# Altium PCB LED6432Clock.PcbDoc (part 2 of 6)
Units mm, origin at the board's own origin, x right, y up, seen from the top; angles counter-clockwise.
Board outline 152.4 x 101.6 mm, 2 copper layers (Top Layer, Bottom Layer); 48 components, 0 nets, 638 pads, 127 vias.
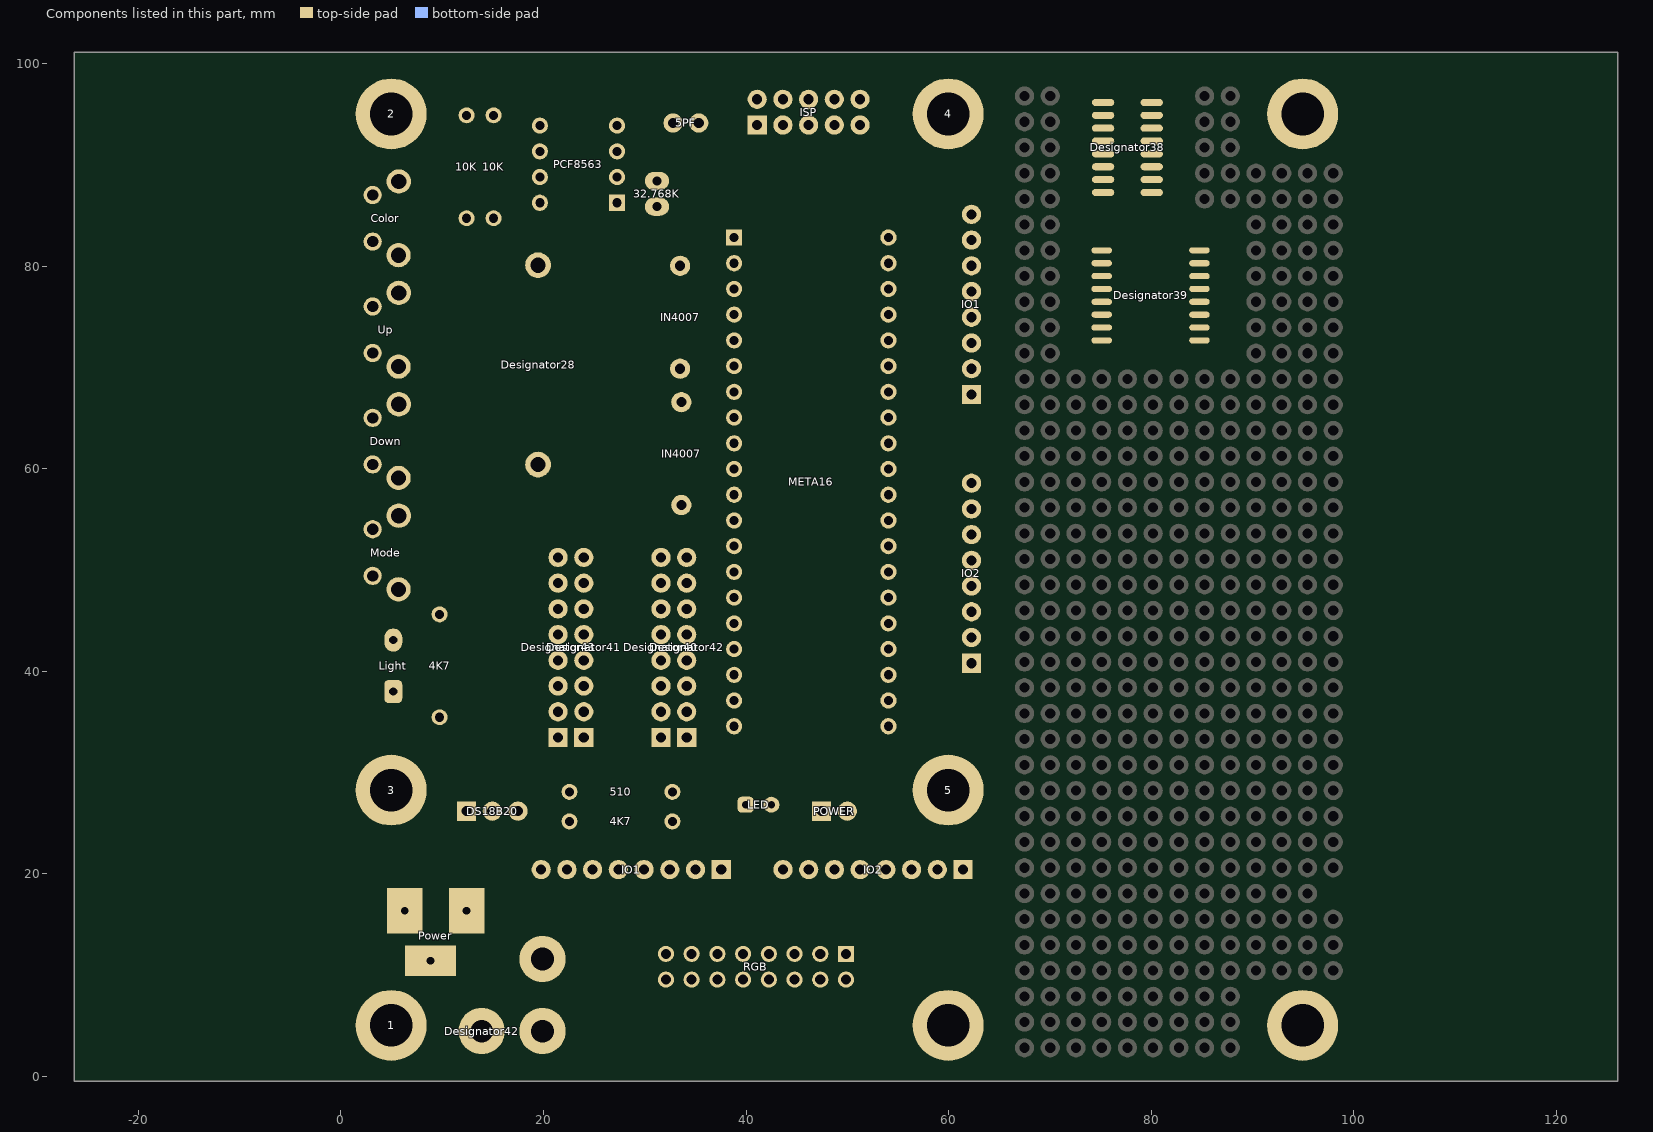
[diagram p2: the components of this part, seen from the top]

## Via types
v1: diameter 0.6, hole 0.3, Top Layer to Bottom Layer, 67 vias
v2: diameter 1.27, hole 0.711, Top Layer to Bottom Layer, 60 vias

## Nets (pads, with @x,y where several pads share a name; then routed paths per layer and width w, separated by ;. In a path a pad name is that pad's centre, name@x,y a point inside that pad or via, vN(x,y) a via of type N, cw(c..) or ccw(c..) an arc to the next point about the centre after c; other vN are vias at no path point) (continued)
copper on no net: (continued)
  Top Layer w0.16: 9.734,40.751 10.515,40.751 11.402,41.638 11.377,41.664 11.377,46.693 11.199,46.871 11.199,57.31 11.199,81.491 12.52,82.812 15.67,82.812 16.33,83.472 19.683,83.472 v1(22.528,83.472) ; 12.535,70.285 ccw(c12.448,70.644) v1@12.791,70.506 ; v1(12.698,70.543) 12.596,70.543 12.164,70.112 ; v1(14.501,76.081) 16.432,74.15 16.432,43.518 21.41,38.539 21.435,38.539 ; v1@14.781,62.415 14.323,61.958 14.323,41.537 19.861,35.999 ; 14.941,26.187 14.941,29.048 15.72,29.827 38.453,29.827 38.733,29.827 v1(41.476,32.57) ; v1(17.422,46.083) 17.422,46.566 ; 20.313,39.484 ccw(c21.692,39.852) 21.418,38.451 ; 20.341,41.547 cw(c20.435,39.953) 21.495,41.147 ; 20.345,41.702 cw(c20.447,39.967) 21.601,41.266 ; 20.349,41.857 cw(c20.46,39.981) 21.708,41.386 ccw(c20.81,40.375) 20.73,41.725 ; 20.374,44.158 cw(c20.362,42.562) 21.5,43.683 ; 20.379,39.236 ccw(c21.638,39.572) 21.387,38.294 ; 20.388,44.313 cw(c20.376,42.575) 21.613,43.795 ; 20.403,44.467 cw(c20.389,42.588) 21.727,43.907 ccw(c20.765,42.958) 20.775,44.31 ; 20.439,39.664 cw(c20.07,38.217) 21.523,38.56 ; 20.446,38.989 ccw(c21.583,39.292) 21.357,38.137 ; 20.489,48.985 ccw(c21.397,49.228) 21.465,48.29 ; 20.493,39.407 ccw(c21.538,39.687) 21.442,38.609 ; 20.538,39.49 cw(c20.246,38.401) 21.366,38.531 ; 20.552,39.186 ccw(c21.517,39.444) 21.427,38.45 ; 20.588,41.561 ccw(c20.571,41.847) 20.785,41.657 ; 20.621,44.157 ccw(c20.624,44.443) 20.825,44.239 ; 20.695,39.598 cw(c20.36,38.285) 21.679,38.597 ; 20.721,49.488 cw(c20.834,47.999) 21.807,49.132 ; 20.734,41.88 cw(c20.822,40.389) 21.814,41.506 ; 20.766,39.429 cw(c20.498,38.43) 21.525,38.55 ; 20.783,39.264 ccw(c20.857,39.541) 21,39.293 ; 20.789,44.464 cw(c20.778,42.971) 21.841,44.02 ; 20.951,39.533 cw(c20.65,38.354) 21.834,38.634 ; 21.207,39.468 cw(c20.94,38.422) 21.99,38.671 ; 21.207,48.75 20.826,48.75 19.734,49.842 ; 21.435,33.459 13.536,33.459 12.164,34.831 12.164,70.112 ; 21.435,35.999 19.861,35.999 ; 21.435,41.079 20.47,41.079 ; 21.435,43.619 20.572,43.619 19.175,45.016 ; 21.435,51.239 21.435,52.586 ; v1(23.798,54.643) 23.366,54.211 23.061,54.211 21.435,52.586 ; v1@25.339,73.862 cw(c25.283,73.475) 25.656,73.592 ; v1(25.347,73.922) 25.652,73.617 ; v1@25.38,73.704 cw(c25.429,73.388) 25.652,73.617 ; v1@25.386,73.705 cw(c25.438,73.417) 25.647,73.622 ; v1@25.406,73.93 ccw(c25.793,73.985) 25.677,73.612 ; v1@25.564,73.883 ccw(c25.852,73.831) 25.647,73.621 ; v1@25.564,73.888 ccw(c25.88,73.84) 25.652,73.617 ; v1@26.286,82.662 ccw(c25.959,83.325) 26.673,83.134 ; v1@26.356,82.519 ccw(c26.166,82.904) 26.582,82.793 ; v1@26.388,82.888 27.354,83.853 34.897,83.853 39.012,87.968 v1@39.012,88.654 ; 26.469,82.971 ccw(c26.791,82.885) v1@26.503,82.718 ; v1(27.1,78.875) 27.1,59.825 22.858,55.583 22.832,55.583 22.528,55.583 19.175,52.23 19.175,45.016 ; v1(27.887,81.059) 27.887,59.799 23.061,54.973 22.705,54.973 19.734,52.001 19.734,49.842 ; v1(29.386,81.872) 29.386,61.806 31.595,59.596 31.595,55.303 31.748,55.151 32.256,55.151 34.186,53.221 ; 31.157,10.332 ccw(c32.31,10.641) 32.07,9.472 ; 31.224,10.082 ccw(c32.252,10.358) 32.038,9.315 ; 31.291,9.832 ccw(c32.194,10.074) 32.006,9.159 ; 31.304,10.48 cw(c30.995,9.327) 32.165,9.566 ; 31.337,10.258 ccw(c32.158,10.478) 32.093,9.63 ; 31.379,10.3 cw(c31.159,9.479) 32.007,9.544 ; 31.395,10.039 ccw(c32.14,10.239) 32.08,9.471 ; 31.554,10.413 cw(c31.279,9.385) 32.322,9.599 ; 31.597,10.241 cw(c31.398,9.497) 32.166,9.557 ; 31.805,10.346 cw(c31.563,9.443) 32.478,9.631 ; 31.908,12.788 ccw(c31.804,13.19) 32.162,12.979 ; 32.047,12.809 ccw(c32.028,13.165) 32.336,12.987 ; 32.086,9.55 30.734,10.903 30.734,17.221 31.75,18.237 v1(34.874,18.237) ; 32.086,12.09 32.467,12.471 v1(32.467,16.821) ; 33.697,10.332 ccw(c34.85,10.641) 34.61,9.472 ; 33.764,10.082 ccw(c34.792,10.358) 34.578,9.315 ; 33.831,9.832 ccw(c34.734,10.074) 34.546,9.159 ; 33.844,10.48 cw(c33.535,9.327) 34.705,9.566 ; 33.877,10.258 ccw(c34.698,10.478) 34.633,9.63 ; 33.919,10.3 cw(c33.699,9.479) 34.547,9.544 ; 33.935,10.039 ccw(c34.68,10.239) 34.62,9.471 ; 34.094,10.413 cw(c33.819,9.385) 34.862,9.599 ; 34.135,46.159 35.278,46.159 ; 34.137,10.241 cw(c33.938,9.497) 34.706,9.557 ; 34.186,51.036 34.186,53.221 ; 34.345,10.346 cw(c34.103,9.443) 35.018,9.631 ; 34.626,9.55 33.35,10.827 33.35,12.954 33.274,13.03 33.274,14.783 33.274,15.342 36.144,18.212 37.008,18.212 37.547,18.751 37.547,18.955 ; 36.237,10.332 ccw(c37.39,10.641) 37.15,9.472 ; 36.304,10.082 ccw(c37.332,10.358) 37.118,9.315 ; v1@36.32,82.862 36.32,80.653 34.008,78.341 34.008,76.208 36.015,74.201 36.015,46.896 35.278,46.159 ; v1@36.338,82.584 cw(c36.218,82.468) 36.362,82.385 cw(c36.61,82.242) v1@36.546,82.521 ; v1@36.354,82.569 cw(c36.149,82.332) 36.42,82.176 ; 36.371,9.832 ccw(c37.274,10.074) 37.086,9.159 ; 36.384,10.48 cw(c36.075,9.327) 37.245,9.566 ; 36.417,10.258 ccw(c37.238,10.478) 37.173,9.63 ; v1@36.458,82.69 cw(c36.278,82.481) 36.517,82.344 ; 36.459,10.3 cw(c36.239,9.479) 37.087,9.544 ; 36.475,10.039 ccw(c37.22,10.239) 37.16,9.471 ; 36.634,10.413 cw(c36.359,9.385) 37.402,9.599 ; 36.677,10.241 cw(c36.478,9.497) 37.246,9.557 ; v1(36.752,79.433) 36.244,79.433 ; 36.885,10.346 cw(c36.643,9.443) 37.558,9.631 ; v1(37.16,16.739) 37.16,12.097 37.166,12.09 ; 37.166,9.55 35.89,10.827 35.89,16.891 36.576,17.577 37.668,17.577 37.922,17.323 v1(38.862,17.323) ; 37.412,49.842 v1(37.412,63.812) ; 37.547,20.415 37.547,18.955 ; 37.888,83.611 ccw(c39.041,83.92) 38.801,82.751 ; 37.955,83.361 ccw(c38.983,83.637) 38.769,82.594 ; 38.022,83.111 ccw(c38.925,83.353) 38.737,82.438 ; 38.035,83.759 cw(c37.726,82.606) 38.896,82.845 ; 38.285,83.692 cw(c38.01,82.664) 39.053,82.878 ; 38.536,83.625 cw(c38.294,82.722) 39.209,82.91 ; 38.777,10.332 ccw(c39.93,10.641) 39.69,9.472 ; 38.817,37.109 43.45,37.109 44.575,38.235 44.575,65.184 44.575,68.13 43.61,69.096 43.61,73.683 v1(43.764,73.838) ; 38.817,39.649 40.402,39.649 ; 38.817,47.269 37.343,47.269 ; 38.817,49.809 37.445,49.809 ; 38.817,62.509 41.418,62.509 41.705,62.796 41.705,91.625 41.705,91.829 42.06,92.184 44.422,92.184 46.175,93.937 ; 38.817,70.129 40.275,70.129 ; 38.817,82.829 37.413,84.234 36.599,84.234 35.431,83.066 28.217,83.066 26.82,81.669 26.82,80.551 26.236,79.967 26.236,78.163 26.388,78.011 26.388,60.155 22.553,56.319 22.172,56.319 18.387,52.535 18.387,44.229 19.175,43.442 19.175,42.375 ; 38.844,10.082 ccw(c39.872,10.358) 39.658,9.315 ; 38.911,9.832 ccw(c39.814,10.074) 39.626,9.159 ; 38.924,10.48 cw(c38.615,9.327) 39.785,9.566 ; 38.957,10.258 ccw(c39.778,10.478) 39.713,9.63 ; 38.999,10.3 cw(c38.779,9.479) 39.627,9.544 ; 39.015,10.039 ccw(c39.76,10.239) 39.7,9.471 ; 39.174,10.413 cw(c38.899,9.385) 39.942,9.599 ; 39.217,10.241 cw(c39.018,9.497) 39.786,9.557 ; 39.425,10.346 cw(c39.183,9.443) 40.098,9.631 ; 39.706,9.55 38.43,10.827 38.43,13.589 39.599,14.757 41.554,14.757 41.656,14.859 41.656,17.577 ; v1(40.765,58.707) 40.765,40.013 40.402,39.649 ; v1@40.945,13.741 40.945,10.852 42.246,9.55 ; 41.095,93.937 41.095,70.95 40.275,70.129 ; 41.317,10.332 ccw(c42.47,10.641) 42.23,9.472 ; 41.384,10.082 ccw(c42.412,10.358) 42.198,9.315 ; 41.451,9.832 ccw(c42.354,10.074) 42.166,9.159 ; 41.464,10.48 cw(c41.155,9.327) 42.325,9.566 ; 41.497,10.258 ccw(c42.318,10.478) 42.253,9.63 ; 41.539,10.3 cw(c41.319,9.479) 42.167,9.544 ; 41.555,10.039 ccw(c42.3,10.239) 42.24,9.471 ; 41.714,10.413 cw(c41.439,9.385) 42.482,9.599 ; 41.757,10.241 cw(c41.558,9.497) 42.326,9.557 ; v1(41.781,44.635) 41.781,41.816 41.908,41.689 v1(41.908,38.438) ; 41.965,10.346 cw(c41.723,9.443) 42.638,9.631 ; 42.575,19.1 cw(c44.866,18.748) 43.496,20.617 ; v1@42.587,42.587 ccw(c42.501,42.909) 42.79,42.743 ; 42.634,19.482 cw(c44.543,19.188) 43.401,20.746 ; v1(42.644,42.375) 42.873,42.603 ; 42.653,42.812 ccw(c42.95,42.639) v1@42.69,42.414 ; 42.693,19.864 cw(c44.22,19.629) 43.306,20.875 ; 42.725,19.224 cw(c44.559,18.898) 43.597,20.492 ; 42.765,43.006 ccw(c43.129,42.794) v1@42.811,42.519 ; 42.787,19.571 cw(c44.317,19.299) 43.514,20.629 ; 42.814,19.023 cw(c44.461,18.688) 43.742,20.208 ; 42.825,42.803 ccw(c43.086,42.652) v1@42.831,42.492 ; v1(42.873,61.603) 42.873,42.603 ; 42.877,19.336 cw(c44.29,19.049) 43.673,20.352 ; 42.903,19.958 cw(c42.211,19.53) 43.003,19.343 ; 42.918,19.935 cw(c42.691,19.785) 42.958,19.731 ; v1(42.924,65.082) 42.924,66.2 42.34,66.784 42.34,90.94 42.924,91.524 46.607,91.524 48.715,93.632 48.715,93.937 ; 42.941,19.65 cw(c44.12,19.41) 43.605,20.497 ; 42.954,19.135 cw(c44.2,18.841) 43.773,20.048 ; 43.022,19.42 cw(c44.083,19.17) 43.72,20.199 ; 43.039,20.043 cw(c42.226,19.541) 43.156,19.321 ; 43.141,19.259 cw(c43.952,19.067) 43.766,19.879 ; 43.2,19.509 cw(c43.888,19.346) 43.73,20.035 ; 43.217,19.848 cw(c43.001,19.56) 43.351,19.477 ; 43.336,68.203 ccw(c44.176,68.428) v1@43.741,67.674 ; 43.343,19.442 cw(c43.677,19.363) 43.666,19.706 ; 43.375,13.272 cw(c43.586,13.394) v1@43.444,13.591 ; v1@43.381,13.422 cw(c43.357,13.233) 43.522,13.328 cw(c43.617,13.383) v1@43.548,13.469 ; v1(43.409,13.64) 43.409,13.462 43.561,13.31 43.561,10.776 ; 43.436,67.83 ccw(c43.903,67.955) v1@43.661,67.536 ; 43.464,13.119 cw(c43.69,13.25) v1@43.537,13.461 ; v1@43.521,67.732 ccw(c43.232,67.899) 43.554,67.985 ; v1@43.623,73.669 cw(c43.549,73.58) 43.649,73.523 cw(c43.82,73.424) v1@43.794,73.62 ; v1@43.634,73.66 cw(c43.477,73.446) 43.707,73.314 ; 43.635,93.556 43.635,93.937 43.635,93.784 ; 43.643,20.415 43.643,19.564 41.656,17.577 ; v1(43.711,67.622) 43.711,67.902 42.949,68.664 42.949,90.33 43.508,90.889 48.766,90.889 51.255,93.378 51.255,93.937 ; v1@43.729,73.789 cw(c43.583,73.591) 43.796,73.468 ; v1(43.79,78.207) 43.79,79.502 43.459,79.832 43.459,81.788 v1@44.221,82.55 ; 43.858,10.337 ccw(c45.015,10.644) 44.77,9.472 ; 43.918,82.22 ccw(c43.738,82.892) v1@44.37,82.601 ; 43.925,10.086 ccw(c44.956,10.36) 44.737,9.315 ; 43.991,9.835 ccw(c44.896,10.076) 44.704,9.159 ; 44,10.479 cw(c43.693,9.321) 44.865,9.567 ; v1(44.018,15.367) 44.018,14.3 44.786,13.532 ; 44.038,10.262 ccw(c44.863,10.481) 44.793,9.63 ; 44.062,82.418 cw(c44.148,82.096) v1@44.315,82.385 ; 44.075,10.299 cw(c43.856,9.474) 44.707,9.544 ; 44.096,10.042 ccw(c44.843,10.241) 44.78,9.471 ; 44.248,82.308 ccw(c44.141,82.706) v1@44.515,82.534 ; 44.251,10.412 cw(c43.977,9.381) 45.021,9.6 ; 44.294,10.241 cw(c44.096,9.494) 44.866,9.557 ; v1(44.295,80.246) 44.905,79.637 44.905,76.868 44.295,76.258 44.295,74.958 44.806,74.447 44.806,68.707 45.083,68.43 45.083,68.334 45.083,44.661 45.337,44.407 v1(45.337,43.467) ; 44.502,10.346 cw(c44.261,9.44) 45.178,9.632 ; 44.786,9.55 43.561,10.776 ; 44.786,12.09 44.786,13.532 ; 45.052,92.966 cw(c46.465,92.598) 46.156,94.025 ; 45.118,93.218 cw(c46.403,92.883) 46.122,94.181 ; 45.183,93.47 cw(c46.341,93.168) 46.088,94.338 ; 45.204,92.814 ccw(c44.836,94.227) 46.263,93.918 ; 45.229,93.054 cw(c46.295,92.769) 46.182,93.867 ; 45.249,93.721 cw(c46.28,93.453) 46.054,94.494 ; 45.289,93.279 cw(c46.27,93.016) 46.166,94.026 ; 45.293,92.99 ccw(c45.007,94.057) 46.105,93.944 ; 45.456,92.879 ccw(c45.121,94.165) 46.419,93.884 ; v1(45.515,81.44) 45.515,76.589 46.886,75.217 46.886,74.353 v1(47.928,73.312) ; 45.517,93.05 ccw(c45.254,94.032) 46.265,93.928 ; v1(45.616,72.804) 45.616,69.553 46.404,68.765 46.404,42.883 46.251,42.73 v1(46.251,41.181) ; 45.708,92.945 ccw(c45.406,94.103) 46.576,93.85 ; 45.96,93.011 ccw(c45.691,94.042) 46.732,93.816 ; 45.974,20.244 45.974,19.355 47.326,18.002 47.326,12.09 ; 46.05,16.276 cw(c46.265,16.151) v1@46.313,16.396 ; 46.107,16.067 ccw(c45.625,16.345) v1@46.148,16.536 ; 46.122,16.402 ccw(c45.948,16.503) v1@46.142,16.555 ; v1@46.18,16.478 cw(c45.83,16.211) 46.201,15.973 ; 46.21,16.244 cw(c46.498,16.077) v1@46.412,16.399 ; v1@46.307,16.575 cw(c46.023,16.358) 46.324,16.165 ; v1(46.355,16.612) 46.228,16.612 46.05,16.434 ; 46.397,10.332 ccw(c47.55,10.641) 47.31,9.472 ; 46.464,10.082 ccw(c47.492,10.358) 47.278,9.315 ; 46.531,9.832 ccw(c47.434,10.074) 47.246,9.159 ; 46.544,10.48 cw(c46.235,9.327) 47.405,9.566 ; v1(46.556,83.675) 46.556,77.605 46.683,77.478 v1(46.683,76.843) ; 46.577,10.258 ccw(c47.398,10.478) 47.333,9.63 ; 46.619,10.3 cw(c46.399,9.479) 47.247,9.544 ; 46.635,10.039 ccw(c47.38,10.239) 47.32,9.471 ; 46.794,10.413 cw(c46.519,9.385) 47.562,9.599 ; 46.837,10.241 cw(c46.638,9.497) 47.406,9.557 ; 47.045,10.346 cw(c46.803,9.443) 47.718,9.631 ; 47.326,9.55 46.05,10.827 46.05,16.434 ; v1(47.597,84.793) 47.597,77.605 47.75,77.452 v1(47.75,75.115) ; 47.647,92.983 cw(c49.264,92.648) 48.617,94.167 ; 47.709,93.283 cw(c49.118,92.99) 48.554,94.314 ; 47.721,92.876 cw(c49.069,92.514) 48.732,93.869 ; 47.771,93.582 cw(c48.972,93.333) 48.492,94.461 ; 47.791,93.138 cw(c48.994,92.815) 48.693,94.024 ; 47.861,93.4 cw(c48.919,93.117) 48.655,94.179 ; 47.902,92.956 cw(c48.898,92.689) 48.748,93.709 ; 47.962,93.502 cw(c47.713,93.359) 47.99,93.284 ; 47.965,93.191 cw(c48.859,92.952) 48.725,93.868 ; 48.093,93.071 cw(c48.713,92.905) 48.714,93.547 ; 48.137,92.912 ccw(c47.847,93.994) 48.964,93.92 ; v1(48.184,16.612) 48.723,17.151 48.723,20.415 ; 48.198,93.088 ccw(c47.985,93.882) 48.805,93.944 ; v1(48.311,14.072) 48.311,13.106 48.59,12.827 48.59,10.827 49.866,9.55 ; 48.352,92.97 ccw(c48.082,93.978) 49.124,93.91 ; v1(48.69,85.91) v1(48.69,81.008) v1@48.74,80.957 ; 48.937,10.332 ccw(c50.09,10.641) 49.85,9.472 ; 49.004,10.082 ccw(c50.032,10.358) 49.818,9.315 ; v1(49.071,78.316) v1(49.071,55.024) v1@49.172,54.922 ; 49.071,9.832 ccw(c49.974,10.074) 49.786,9.159 ; 49.084,10.48 cw(c48.775,9.327) 49.945,9.566 ; 49.117,10.258 ccw(c49.938,10.478) 49.873,9.63 ; 49.159,10.3 cw(c48.939,9.479) 49.787,9.544 ; 49.175,10.039 ccw(c49.92,10.239) 49.86,9.471 ; 49.334,10.413 cw(c49.059,9.385) 50.102,9.599 ; 49.377,10.241 cw(c49.178,9.497) 49.946,9.557 ; 49.585,10.346 cw(c49.343,9.443) 50.258,9.631 ; 50.183,92.818 cw(c52.081,92.476) 51.132,94.154 ; 50.244,93.153 cw(c51.863,92.862) 51.053,94.294 ; 50.246,92.702 cw(c51.868,92.309) 51.28,93.871 ; 50.304,93.489 cw(c51.645,93.247) 50.974,94.433 ; 50.317,92.996 cw(c51.739,92.652) 51.223,94.021 ; 50.388,93.29 cw(c51.61,92.995) 51.167,94.171 ; 50.398,92.79 cw(c51.665,92.45) 51.316,93.715 ; 50.47,93.06 cw(c51.579,92.762) 51.274,93.869 ; 50.53,93.284 ccw(c50.253,93.359) 50.502,93.502 cw(c49.796,93.095) 50.583,92.884 ; 50.582,92.882 cw(c51.472,92.644) 51.32,93.552 ; 50.647,93.123 cw(c51.427,92.914) 51.293,93.71 ; 50.665,93.542 cw(c50.064,93.141) 50.762,92.954 ; 50.779,93.018 cw(c51.26,92.889) 51.257,93.387 ; v1(50.95,52.205) 51.026,52.281 v1(51.026,79.027) ; 50.97,92.99 ccw(c50.726,93.898) 51.664,93.966 ; v1@51.133,85.829 cw(c50.939,85.288) 51.493,85.437 ; v1(51.153,85.885) 51.153,85.783 51.763,85.174 51.763,38.133 52.787,37.109 ; v1@51.187,85.979 cw(c51.065,85.639) 51.414,85.732 ; v1(51.534,87.206) 52.271,86.469 52.271,40.444 53.066,39.649 ; v1(53.846,88.45) 53.846,83.041 54.057,82.829 ; 54.057,37.109 52.787,37.109 ; 54.057,39.649 53.066,39.649 ; 54.057,59.969 54.585,59.969 ; 54.057,72.669 56.896,72.669 56.998,72.568 56.998,59.69 57.633,59.055 61.773,59.055 62.255,58.572 ; 54.057,75.209 57.302,75.209 57.937,74.574 57.937,69.698 60.3,67.335 ; 54.057,77.749 58.166,77.749 58.928,76.987 58.928,71.349 60.401,69.875 ; 54.057,80.289 57.683,80.289 59.893,78.08 59.893,72.949 60.427,72.415 ; v1(59.411,83.287) 59.411,81.28 60.655,80.035 ; 61.038,58.848 cw(c60.628,58.147) 61.414,58.352 ; 61.216,58.916 cw(c61.046,58.621) 61.386,58.607 ; 61.291,58.563 cw(c61.148,58.346) 61.403,58.398 ; 62.255,67.335 60.3,67.335 ; 62.255,69.875 60.401,69.875 ; 62.255,72.415 60.427,72.415 ; 62.255,80.035 60.655,80.035 ; 69.478,83.979 ccw(c70.52,84.204) 70.251,83.173 ; 69.582,76.825 cw(c70.762,75.925) 70.571,77.396 ; 69.582,81.213 ccw(c70.762,82.114) 70.571,80.643 ; 69.63,71.459 cw(c70.74,71.296) 70.45,72.38 ; 69.63,74.003 cw(c70.751,73.827) 70.457,74.922 ; 69.635,84.013 ccw(c70.805,84.266) 70.503,83.108 ; 69.788,71.436 cw(c71.002,71.258) 70.685,72.443 ; 69.788,73.978 cw(c71.017,73.785) 70.695,74.986 ; 69.791,84.047 ccw(c71.09,84.328) 70.754,83.042 ; 69.945,71.402 cw(c70.871,71.375) 70.631,72.269 ; 69.945,73.943 cw(c70.887,73.902) 70.643,74.812 ; 69.946,71.412 cw(c71.264,71.22) 70.92,72.506 ; 69.946,73.953 cw(c71.283,73.743) 70.933,75.05 ; 69.946,84.09 ccw(c70.956,84.194) 70.693,83.213 ; 69.947,84.08 ccw(c71.375,84.389) 71.006,82.976 ; 70.024,71.468 ccw(c69.817,72.678) 71.003,72.361 ; 70.024,74.009 ccw(c69.836,75.197) 70.999,74.886 ; 70.025,71.629 ccw(c69.984,72.492) 70.818,72.268 ; 70.028,74.169 ccw(c70.002,75.009) 70.814,74.792 ; 70.028,84.03 cw(c69.915,82.931) 70.982,83.217 ; 70.032,71.469 ccw(c69.995,72.262) 70.762,72.057 ; 70.033,74.009 ccw(c70.009,74.784) 70.758,74.584 ; 70.035,71.534 73.711,75.209 74.295,75.209 ; 70.035,76.479 71.28,77.724 ; 70.035,79.019 70.086,78.969 74.549,78.969 ; 70.035,81.559 71.28,80.315 ; 70.035,84.099 72.474,81.661 74.498,81.661 ; 70.045,84.189 cw(c69.94,83.178) 70.922,83.441 ; 70.049,73.851 ccw(c69.879,74.931) 70.935,74.648 ; 70.051,71.311 ccw(c69.863,72.408) 70.938,72.12 ; 70.054,84.187 cw(c69.746,82.76) 71.158,83.129 ; 70.061,73.853 ccw(c69.603,75.389) 71.162,75.018 ; 70.063,71.314 ccw(c69.569,72.874) 71.163,72.502 ; 70.074,73.692 ccw(c69.921,74.665) 70.871,74.41 ; 70.077,71.153 ccw(c69.91,72.137) 70.874,71.879 ; 70.088,84.344 cw(c69.807,83.045) 71.093,83.38 ; 70.105,84.107 ccw(c71.204,84.22) 70.918,83.153 ; 70.107,73.7 ccw(c69.694,75.082) 71.098,74.748 ; 70.111,71.161 ccw(c69.668,72.562) 71.099,72.228 ; 70.122,84.5 cw(c69.869,83.33) 71.027,83.632 ; 70.153,73.547 ccw(c69.786,74.776) 71.034,74.479 ; 70.156,84.656 cw(c69.931,83.615) 70.962,83.884 ; 70.159,71.008 ccw(c69.766,72.251) 71.035,71.955 ; 70.18,74.193 72.542,76.556 74.676,76.556 ; 70.198,73.393 ccw(c69.877,74.469) 70.97,74.209 ; 70.207,70.856 ccw(c69.865,71.939) 70.971,71.681 ; 70.381,76.026 ccw(c69.481,77.206) 70.952,77.015 ; 70.381,82.012 cw(c69.481,80.833) 70.952,81.024 ; 70.76,72.052 ccw(c71.037,71.978) 70.789,71.834 ; 70.76,74.592 ccw(c71.037,74.518) 70.789,74.374 ; 72.575,68.859 72.575,73.16 73.33,73.914 74.498,73.914 ; 74.397,77.724 71.28,77.724 ; 74.727,80.315 71.28,80.315 ; 74.905,69.07 74.905,72.619 ; 74.936,72.534 cw(c74.739,72.386) 74.953,72.262 ; 74.954,72.513 cw(c74.677,72.246) 75.01,72.053 ; 74.974,72.299 cw(c75.259,72.134) 75.174,72.452 ; 75.069,72.624 cw(c74.836,72.399) 75.116,72.237 ; 85.166,78.969 90.305,78.969 90.355,79.019 ; 85.192,77.673 89.162,77.673 ; 85.242,80.264 89.06,80.264 ; 85.287,72.552 cw(c84.882,72.302) 85.342,72.179 cw(c85.78,72.062) 85.578,72.468 ; 85.293,81.61 86.284,81.61 88.646,83.972 ; 85.344,68.928 85.344,72.619 ; 85.344,73.965 86.436,73.965 88.646,71.755 88.646,69.69 ; 85.362,72.477 cw(c85.244,72.283) 85.441,72.17 ; 85.395,76.505 87.79,76.505 90.355,73.939 ; 85.445,72.614 cw(c85.329,72.423) 85.523,72.311 ; 85.471,75.159 86.596,75.159 90.355,71.399 ; 87.815,68.859 88.646,69.69 ; 89.232,72.37 ccw(c90.645,72.739) 90.336,71.311 ; 89.232,74.91 ccw(c90.645,75.279) 90.336,73.851 ; 89.298,72.118 ccw(c90.584,72.454) 90.303,71.155 ; 89.298,74.658 ccw(c90.584,74.994) 90.303,73.695 ; 89.364,71.867 ccw(c90.522,72.169) 90.269,70.999 ; 89.364,74.407 ccw(c90.522,74.709) 90.269,73.539 ; 89.384,80.818 cw(c90.904,80.572) 90.156,81.918 ; 89.385,72.522 cw(c89.016,71.11) 90.443,71.418 ; 89.385,75.062 cw(c89.016,73.65) 90.443,73.958 ; 89.409,72.282 ccw(c90.476,72.568) 90.363,71.469 ; 89.409,74.822 ccw(c90.476,75.108) 90.363,74.009 ; 89.429,71.615 ccw(c90.46,71.884) 90.235,70.842 ; 89.429,74.155 ccw(c90.46,74.424) 90.235,73.382 ; 89.437,81.143 cw(c90.7,80.939) 90.079,82.058 ; 89.457,77.049 ccw(c90.943,77.191) 89.993,76.04 ; 89.469,72.057 ccw(c90.45,72.32) 90.346,71.31 ; 89.469,74.597 ccw(c90.45,74.86) 90.346,73.85 ; 89.473,72.346 cw(c89.187,71.279) 90.286,71.392 ; 89.473,74.886 cw(c89.187,73.819) 90.286,73.932 ; 89.55,80.873 cw(c90.748,80.679) 90.254,81.788 ; 89.609,77.077 ccw(c90.955,77.206) 90.094,76.163 ; 89.614,80.588 ccw(c89.368,82.108) 90.714,81.36 ; 89.636,72.457 cw(c89.301,71.171) 90.6,71.452 ; 89.636,74.997 cw(c89.301,73.711) 90.6,73.992 ; 89.669,80.754 ccw(c89.475,81.952) 90.584,81.458 ; 89.697,72.286 cw(c89.434,71.304) 90.445,71.409 ; 89.697,74.826 cw(c89.434,73.844) 90.445,73.949 ; 89.758,77.226 cw(c89.629,75.88) 90.672,76.74 ; 89.786,77.378 cw(c89.643,75.892) 90.795,76.842 ; 89.888,72.391 cw(c89.586,71.233) 90.756,71.486 ; 89.888,74.931 cw(c89.586,73.773) 90.756,74.026 ; 89.939,80.641 ccw(c89.735,81.904) 90.854,81.283 ; 90.14,72.326 cw(c89.871,71.295) 90.912,71.52 ; 90.14,74.866 cw(c89.871,73.835) 90.912,74.06 ; 90.355,76.479 89.162,77.673 ; 90.355,81.559 89.06,80.264 ; 90.526,83.972 88.646,83.972 ; 12.164,70.112 cw(c12.676,69.6) 12.693,70.323 ccw(c12.676,69.6) 12.164,70.112 ; 14.329,61.964 cw(c14.704,61.588) 14.704,62.119 ccw(c14.704,61.588) 14.329,61.964 ; 14.329,61.964 ccw(c13.953,62.339) 14.484,62.339 cw(c13.953,62.339) 14.329,61.964 ; 14.877,75.705 cw(c15.252,76.081) 14.721,76.081 ccw(c15.252,76.081) 14.877,75.705 ; 14.877,75.705 ccw(c14.501,75.329) 14.501,75.861 cw(c14.501,75.329) 14.877,75.705 ; 14.941,27.515 cw(c13.614,27.515) 14.552,26.576 ccw(c13.614,27.515) 14.941,27.515 ; 14.941,27.515 ccw(c16.269,27.515) 15.33,26.576 cw(c16.269,27.515) 14.941,27.515 ; 14.941,27.901 cw(c13.227,27.901) 14.439,26.689 ccw(c13.227,27.901) 14.941,27.901 ; 14.941,27.901 ccw(c16.655,27.901) 15.443,26.689 cw(c16.655,27.901) 14.941,27.901 ; 14.941,28.288 cw(c12.841,28.288) 14.326,26.803 ccw(c12.841,28.288) 14.941,28.288 ; 14.941,28.288 ccw(c17.042,28.288) 15.557,26.803 cw(c17.042,28.288) 14.941,28.288 ; 17.422,46.566 cw(c17.003,46.566) 17.278,46.249 ccw(c17.003,46.566) 17.422,46.566 ; 17.422,46.566 ccw(c17.841,46.566) 17.566,46.249 cw(c17.841,46.566) 17.422,46.566 ; 17.422,46.566 17.651,46.794 17.651,52.865 21.74,56.954 22.172,56.954 25.652,60.434 25.652,73.617 ; 19.175,42.375 ccw(c20.548,43.748) 21.161,41.905 cw(c20.548,43.748) 19.175,42.375 ; 19.175,42.375 20.47,41.079 ; 19.175,45.016 ccw(c20.68,46.522) 21.216,44.461 cw(c20.68,46.522) 19.175,45.016 ; 19.335,33.459 cw(c19.335,31.359) 20.82,32.844 ccw(c19.335,31.359) 19.335,33.459 ; 19.335,33.459 ccw(c19.335,35.56) 20.82,34.075 cw(c19.335,35.56) 19.335,33.459 ; 19.721,33.459 cw(c19.721,31.745) 20.933,32.957 ccw(c19.721,31.745) 19.721,33.459 ; 19.721,33.459 ccw(c19.721,35.173) 20.933,33.961 cw(c19.721,35.173) 19.721,33.459 ; 19.734,49.842 ccw(c20.697,50.805) 21.147,49.52 cw(c20.697,50.805) 19.734,49.842 ; 19.861,35.999 cw(c19.861,35.009) 20.699,35.536 ccw(c19.861,35.009) 19.861,35.999 ; 19.861,35.999 ccw(c19.861,36.99) 20.699,36.462 cw(c19.861,36.99) 19.861,35.999 ; 20.108,33.459 cw(c20.108,32.132) 21.046,33.07 ccw(c20.108,32.132) 20.108,33.459 ; 20.108,33.459 ccw(c20.108,34.787) 21.046,33.848 cw(c20.108,34.787) 20.108,33.459 ; 20.15,35.999 cw(c20.15,35.191) 20.834,35.621 ccw(c20.15,35.191) 20.15,35.999 ; 20.15,35.999 ccw(c20.15,36.807) 20.834,36.377 cw(c20.15,36.807) 20.15,35.999 ; 20.44,35.999 cw(c20.44,35.373) 20.97,35.707 ccw(c20.44,35.373) 20.44,35.999 ; 20.44,35.999 ccw(c20.44,36.625) 20.97,36.292 cw(c20.44,36.625) 20.44,35.999 ; 20.47,41.079 cw(c20.47,40.979) 20.57,40.989 ccw(c20.47,40.979) 20.47,41.079 ; 20.47,41.079 ccw(c20.47,41.18) 20.57,41.169 cw(c20.47,41.18) 20.47,41.079 ; 21.435,52.338 cw(c20.94,52.338) 21.144,51.887 ccw(c20.94,52.338) 21.435,52.338 ; 21.435,52.338 ccw(c21.93,52.338) 21.727,51.887 cw(c21.93,52.338) 21.435,52.338 ; 21.435,52.586 cw(c20.829,52.586) 21.078,52.033 ccw(c20.829,52.586) 21.435,52.586 ; 21.435,52.586 ccw(c22.042,52.586) 21.793,52.033 cw(c22.042,52.586) 21.435,52.586 ; 21.996,83.472 cw(c21.996,82.941) 22.372,83.316 ccw(c21.996,82.941) 21.996,83.472 ; 21.996,83.472 ccw(c21.996,84.003) 22.372,83.628 cw(c21.996,84.003) 21.996,83.472 ; 23.422,54.267 cw(c23.798,53.892) 23.798,54.423 ccw(c23.798,53.892) 23.422,54.267 ; 23.422,54.267 ccw(c23.046,54.643) 23.578,54.643 cw(c23.046,54.643) 23.422,54.267 ; 25.647,73.622 cw(c25.866,73.835) 25.564,73.886 ccw(c25.866,73.835) 25.652,73.617 ; 25.647,73.621 ccw(c25.433,73.403) 25.383,73.705 cw(c25.433,73.403) 25.652,73.617 ; 25.652,73.617 cw(c25.873,73.838) 25.564,73.887 ccw(c25.873,73.838) 25.652,73.617 ; 25.652,73.617 ccw(c25.431,73.396) 25.382,73.704 cw(c25.431,73.396) 25.652,73.617 ; 27.1,78.343 cw(c27.631,78.343) 27.255,78.719 ccw(c27.631,78.343) 27.1,78.343 ; 27.1,78.343 ccw(c26.568,78.343) 26.944,78.719 cw(c26.568,78.343) 27.1,78.343 ; 27.887,80.528 cw(c28.418,80.528) 28.043,80.903 ccw(c28.418,80.528) 27.887,80.528 ; 27.887,80.528 ccw(c27.356,80.528) 27.731,80.903 cw(c27.356,80.528) 27.887,80.528 ; 29.386,81.341 cw(c29.917,81.341) 29.541,81.716 ccw(c29.917,81.341) 29.386,81.341 ; 29.386,81.341 ccw(c28.854,81.341) 29.23,81.716 cw(c28.854,81.341) 29.386,81.341 ; 30.857,10.78 cw(c29.628,9.55) 31.366,9.55 ccw(c29.628,9.55) 30.857,10.78 ; 30.857,10.78 ccw(c32.086,12.009) 32.086,10.27 cw(c32.086,12.009) 30.857,10.78 ; 31.13,10.506 cw(c30.174,9.55) 31.526,9.55 ccw(c30.174,9.55) 31.13,10.506 ; 31.13,10.506 ccw(c32.086,11.462) 32.086,10.11 cw(c32.086,11.462) 31.13,10.506 ; 31.404,10.233 cw(c30.721,9.55) 31.686,9.55 ccw(c30.721,9.55) 31.404,10.233 ; 31.404,10.233 ccw(c32.086,10.916) 32.086,9.95 cw(c32.086,10.916) 31.404,10.233 ; 32.467,16.29 cw(c32.999,16.29) 32.623,16.665 ccw(c32.999,16.29) 32.467,16.29 ; 32.467,16.29 ccw(c31.936,16.29) 32.312,16.665 cw(c31.936,16.29) 32.467,16.29 ; 33.397,10.78 cw(c32.168,9.55) 33.906,9.55 ccw(c32.168,9.55) 33.397,10.78 ; 33.397,10.78 ccw(c34.626,12.009) 34.626,10.27 cw(c34.626,12.009) 33.397,10.78 ; 33.67,10.506 cw(c32.714,9.55) 34.066,9.55 ccw(c32.714,9.55) 33.67,10.506 ; 33.67,10.506 ccw(c34.626,11.462) 34.626,10.11 cw(c34.626,11.462) 33.67,10.506 ; 33.944,10.233 cw(c33.261,9.55) 34.226,9.55 ccw(c33.261,9.55) 33.944,10.233 ; 33.944,10.233 ccw(c34.626,10.916) 34.626,9.95 cw(c34.626,10.916) 33.944,10.233 ; 34.186,53.221 cw(c32.465,53.221) 33.575,51.904 ccw(c32.465,53.221) 34.186,53.221 ; 34.343,18.237 cw(c34.343,17.706) 34.719,18.082 ccw(c34.343,17.706) 34.343,18.237 ; 34.343,18.237 ccw(c34.343,18.768) 34.719,18.393 cw(c34.343,18.768) 34.343,18.237 ; 35.278,46.159 cw(c35.278,46.475) 34.974,46.391 ccw(c35.278,46.475) 35.278,46.159 ; 35.278,46.159 ccw(c35.278,45.844) 34.974,45.928 cw(c35.278,45.844) 35.278,46.159 ; 35.937,10.78 cw(c34.708,9.55) 36.446,9.55 ccw(c34.708,9.55) 35.937,10.78 ; 35.937,10.78 ccw(c37.166,12.009) 37.166,10.27 cw(c37.166,12.009) 35.937,10.78 ; 36.21,10.506 cw(c35.254,9.55) 36.606,9.55 ccw(c35.254,9.55) 36.21,10.506 ; 36.21,10.506 ccw(c37.166,11.462) 37.166,10.11 cw(c37.166,11.462) 36.21,10.506 ; 36.244,79.433 cw(c36.244,78.957) 36.591,79.283 ccw(c36.244,78.957) 36.244,79.433 ; 36.244,79.433 ccw(c36.244,79.91) 36.591,79.584 cw(c36.244,79.91) 36.244,79.433 ; 36.244,79.433 35.05,78.24 35.05,78.138 35.05,76.081 36.574,74.557 36.574,48.039 37.082,47.531 37.343,47.269 ; 36.484,10.233 cw(c35.801,9.55) 36.766,9.55 ccw(c35.801,9.55) 36.484,10.233 ; 36.484,10.233 ccw(c37.166,10.916) 37.166,9.95 cw(c37.166,10.916) 36.484,10.233 ; 37.16,16.207 cw(c37.691,16.207) 37.316,16.583 ccw(c37.691,16.207) 37.16,16.207 ; 37.16,16.207 ccw(c36.629,16.207) 37.005,16.583 cw(c36.629,16.207) 37.16,16.207 ; 37.343,47.269 cw(c37.343,46.121) 38.249,46.827 ccw(c37.343,46.121) 37.343,47.269 ; 37.343,47.269 ccw(c37.343,48.418) 38.249,47.712 cw(c37.343,48.418) 37.343,47.269 ; 37.412,63.281 cw(c37.943,63.281) 37.568,63.657 ccw(c37.943,63.281) 37.412,63.281 ; 37.412,63.281 ccw(c36.881,63.281) 37.256,63.657 cw(c36.881,63.281) 37.412,63.281 ; 37.445,49.809 cw(c37.445,48.862) 38.225,49.4 ccw(c37.445,48.862) 37.445,49.809 ; 37.445,49.809 ccw(c37.445,50.757) 38.225,50.219 cw(c37.445,50.757) 37.445,49.809 ; 37.547,18.955 cw(c38.339,18.955) 37.962,19.65 ccw(c38.339,18.955) 37.547,18.955 ; 37.547,18.955 ccw(c36.756,18.955) 37.133,19.65 cw(c36.756,18.955) 37.547,18.955 ; 37.547,19.223 cw(c38.193,19.223) 37.886,19.791 ccw(c38.193,19.223) 37.547,19.223 ; 37.547,19.223 ccw(c36.902,19.223) 37.209,19.791 cw(c36.902,19.223) 37.547,19.223 ; 37.588,84.059 cw(c36.359,82.829) 38.097,82.829 ccw(c36.359,82.829) 37.588,84.059 ; 37.588,84.059 ccw(c38.817,85.288) 38.817,83.549 cw(c38.817,85.288) 37.588,84.059 ; 37.671,47.269 cw(c37.671,46.376) 38.376,46.925 ccw(c37.671,46.376) 37.671,47.269 ; 37.671,47.269 ccw(c37.671,48.163) 38.376,47.614 cw(c37.671,48.163) 37.671,47.269 ; 37.75,49.809 cw(c37.75,49.072) 38.357,49.491 ccw(c37.75,49.072) 37.75,49.809 ; 37.75,49.809 ccw(c37.75,50.547) 38.357,50.128 cw(c37.75,50.547) 37.75,49.809 ; 37.861,83.785 cw(c36.905,82.829) 38.257,82.829 ccw(c36.905,82.829) 37.861,83.785 ; 37.861,83.785 ccw(c38.817,84.741) 38.817,83.389 cw(c38.817,84.741) 37.861,83.785 ; 37.999,47.269 cw(c37.999,46.631) 38.502,47.024 ccw(c37.999,46.631) 37.999,47.269 ; 37.999,47.269 ccw(c37.999,47.908) 38.502,47.515 cw(c37.999,47.908) 37.999,47.269 ; 38.135,83.512 cw(c37.452,82.829) 38.417,82.829 ccw(c37.452,82.829) 38.135,83.512 ; 38.135,83.512 ccw(c38.817,84.195) 38.817,83.229 cw(c38.817,84.195) 38.135,83.512 ; 38.331,17.323 cw(c38.331,16.792) 38.706,17.167 ccw(c38.331,16.792) 38.331,17.323 ; 38.331,17.323 ccw(c38.331,17.854) 38.706,17.478 cw(c38.331,17.854) 38.331,17.323 ; 38.477,10.78 cw(c37.248,9.55) 38.986,9.55 ccw(c37.248,9.55) 38.477,10.78 ; 38.477,10.78 ccw(c39.706,12.009) 39.706,10.27 cw(c39.706,12.009) 38.477,10.78 ; 38.75,10.506 cw(c37.794,9.55) 39.146,9.55 ccw(c37.794,9.55) 38.75,10.506 ; 38.75,10.506 ccw(c39.706,11.462) 39.706,10.11 cw(c39.706,11.462) 38.75,10.506 ; 39.024,10.233 cw(c38.341,9.55) 39.306,9.55 ccw(c38.341,9.55) 39.024,10.233 ; 39.024,10.233 ccw(c39.706,10.916) 39.706,9.95 cw(c39.706,10.916) 39.024,10.233 ; 39.627,70.129 cw(c39.627,70.749) 39.135,70.372 ccw(c39.627,70.749) 39.627,70.129 ; 39.627,70.129 ccw(c39.627,69.51) 39.135,69.886 cw(c39.627,69.51) 39.627,70.129 ; 39.697,39.649 cw(c39.697,40.418) 39.119,39.912 ccw(c39.697,40.418) 39.697,39.649 ; 39.697,39.649 ccw(c39.697,38.881) 39.119,39.386 cw(c39.697,38.881) 39.697,39.649 ; 39.783,37.109 cw(c39.783,38.075) 39.1,37.392 ccw(c39.783,38.075) 39.783,37.109 ; 39.783,37.109 ccw(c39.783,36.144) 39.1,36.827 cw(c39.783,36.144) 39.783,37.109 ; 39.783,62.509 cw(c39.783,63.475) 39.1,62.792 ccw(c39.783,63.475) 39.783,62.509 ; 39.783,62.509 ccw(c39.783,61.544) 39.1,62.227 cw(c39.783,61.544) 39.783,62.509 ; 39.951,70.129 cw(c39.951,70.996) 39.262,70.47 ccw(c39.951,70.996) 39.951,70.129 ; 39.951,70.129 ccw(c39.951,69.263) 39.262,69.789 cw(c39.951,69.263) 39.951,70.129 ; 40.049,39.649 cw(c40.049,40.725) 39.239,40.018 ccw(c40.049,40.725) 40.049,39.649 ; 40.049,39.649 ccw(c40.049,38.574) 39.239,39.281 cw(c40.049,38.574) 40.049,39.649 ; 40.169,37.109 cw(c40.169,38.461) 39.213,37.505 ccw(c40.169,38.461) 40.169,37.109 ; 40.169,37.109 ccw(c40.169,35.757) 39.213,36.713 cw(c40.169,35.757) 40.169,37.109 ; 40.169,62.509 cw(c40.169,63.861) 39.213,62.905 ccw(c40.169,63.861) 40.169,62.509 ; 40.169,62.509 ccw(c40.169,61.157) 39.213,62.113 cw(c40.169,61.157) 40.169,62.509 ; 40.275,70.129 cw(c40.275,71.244) 39.389,70.567 ccw(c40.275,71.244) 40.275,70.129 ; 40.275,70.129 ccw(c40.275,69.015) 39.389,69.692 cw(c40.275,69.015) 40.275,70.129 ; 40.402,39.649 cw(c40.402,41.032) 39.36,40.123 ccw(c40.402,41.032) 40.402,39.649 ; 40.402,39.649 ccw(c40.402,38.267) 39.36,39.176 cw(c40.402,38.267) 40.402,39.649 ; 40.556,37.109 cw(c40.556,38.848) 39.327,37.619 ccw(c40.556,38.848) 40.556,37.109 ; 40.556,37.109 ccw(c40.556,35.371) 39.327,36.6 cw(c40.556,35.371) 40.556,37.109 ; 40.556,62.509 cw(c40.556,64.248) 39.327,63.019 ccw(c40.556,64.248) 40.556,62.509 ; 40.556,62.509 ccw(c40.556,60.771) 39.327,62 cw(c40.556,60.771) 40.556,62.509 ; 40.765,58.176 cw(c41.296,58.176) 40.92,58.551 ccw(c41.296,58.176) 40.765,58.176 ; 40.765,58.176 ccw(c40.234,58.176) 40.609,58.551 cw(c40.234,58.176) 40.765,58.176 ; 41.017,10.78 cw(c39.788,9.55) 41.526,9.55 ccw(c39.788,9.55) 41.017,10.78 ; 41.017,10.78 ccw(c42.246,12.009) 42.246,10.27 cw(c42.246,12.009) 41.017,10.78 ; 41.095,91.836 cw(c43.195,91.836) 41.71,93.322 ccw(c43.195,91.836) 41.095,91.836 ; 41.095,91.836 ccw(c38.995,91.836) 40.48,93.322 cw(c38.995,91.836) 41.095,91.836 ; 41.095,92.223 cw(c42.809,92.223) 41.597,93.435 ccw(c42.809,92.223) 41.095,92.223 ; 41.095,92.223 ccw(c39.381,92.223) 40.593,93.435 cw(c39.381,92.223) 41.095,92.223 ; 41.095,92.609 cw(c42.423,92.609) 41.484,93.548 ccw(c42.423,92.609) 41.095,92.609 ; 41.095,92.609 ccw(c39.767,92.609) 40.706,93.548 cw(c39.767,92.609) 41.095,92.609 ; 41.1,32.195 cw(c41.476,31.819) 41.476,32.35 ccw(c41.476,31.819) 41.1,32.195 ; 41.1,32.195 ccw(c40.725,32.57) 41.256,32.57 cw(c40.725,32.57) 41.1,32.195 ; 41.29,10.506 cw(c40.334,9.55) 41.686,9.55 ccw(c40.334,9.55) 41.29,10.506 ; 41.29,10.506 ccw(c42.246,11.462) 42.246,10.11 cw(c42.246,11.462) 41.29,10.506 ; 41.564,10.233 cw(c40.881,9.55) 41.846,9.55 ccw(c40.881,9.55) 41.564,10.233 ; 41.564,10.233 ccw(c42.246,10.916) 42.246,9.95 cw(c42.246,10.916) 41.564,10.233 ; 41.656,17.577 ccw(c38.954,20.279) 42.774,20.39 cw(c38.954,20.279) 41.656,17.577 ; 41.781,44.104 cw(c42.312,44.104) 41.936,44.48 ccw(c42.312,44.104) 41.781,44.104 ; 41.781,44.104 ccw(c41.25,44.104) 41.625,44.48 cw(c41.25,44.104) 41.781,44.104 ; 41.908,38.969 cw(c41.377,38.969) 41.752,38.593 ccw(c41.377,38.969) 41.908,38.969 ; 41.908,38.969 ccw(c42.439,38.969) 42.063,38.593 cw(c42.439,38.969) 41.908,38.969 ; 42.873,42.603 cw(c42.783,42.694) 42.732,42.577 ccw(c42.783,42.694) 42.873,42.603 ; 42.873,42.603 ccw(c42.963,42.513) 42.846,42.462 cw(c42.963,42.513) 42.873,42.603 ; 42.873,61.071 cw(c43.404,61.071) 43.029,61.447 ccw(c43.404,61.071) 42.873,61.071 ; 42.873,61.071 ccw(c42.342,61.071) 42.717,61.447 cw(c42.342,61.071) 42.873,61.071 ; 42.924,65.614 cw(c42.393,65.614) 42.768,65.238 ccw(c42.393,65.614) 42.924,65.614 ; 42.924,65.614 ccw(c43.455,65.614) 43.079,65.238 cw(c43.455,65.614) 42.924,65.614 ; 43.561,10.776 cw(c42.341,9.556) 44.066,9.552 ccw(c42.341,9.556) 43.561,10.776 ; 43.561,10.776 ccw(c44.781,11.996) 44.785,10.27 cw(c44.781,11.996) 43.561,10.776 ; 43.79,78.738 cw(c43.258,78.738) 43.634,78.362 ccw(c43.258,78.738) 43.79,78.738 ; 43.79,78.738 ccw(c44.321,78.738) 43.945,78.362 cw(c44.321,78.738) 43.79,78.738 ; 43.833,10.503 cw(c42.884,9.555) 44.226,9.552 ccw(c42.884,9.555) 43.833,10.503 ; 43.833,10.503 ccw(c44.782,11.452) 44.785,10.11 cw(c44.782,11.452) 43.833,10.503 ; 44.018,14.836 cw(c44.549,14.836) 44.174,15.211 ccw(c44.549,14.836) 44.018,14.836 ; 44.018,14.836 ccw(c43.487,14.836) 43.863,15.211 cw(c43.487,14.836) 44.018,14.836 ; 44.106,10.231 cw(c43.428,9.553) 44.386,9.551 ccw(c43.428,9.553) 44.106,10.231 ; 44.106,10.231 ccw(c44.783,10.909) 44.786,9.95 cw(c44.783,10.909) 44.106,10.231 ; 44.671,79.871 cw(c45.047,80.246) 44.515,80.246 ccw(c45.047,80.246) 44.671,79.871 ; 44.671,79.871 ccw(c44.295,79.495) 44.295,80.026 cw(c44.295,79.495) 44.671,79.871 ; 44.69,92.452 cw(c46.175,90.966) 46.175,93.067 ccw(c46.175,90.966) 44.69,92.452 ; 44.69,92.452 ccw(c43.205,93.937) 45.305,93.937 cw(c43.205,93.937) 44.69,92.452 ; 44.786,12.891 cw(c44.185,12.891) 44.546,12.41 ccw(c44.185,12.891) 44.786,12.891 ; 44.786,12.891 ccw(c45.388,12.891) 45.027,12.41 cw(c45.388,12.891) 44.786,12.891 ; 44.786,13.212 cw(c43.944,13.212) 44.45,12.538 ccw(c43.944,13.212) 44.786,13.212 ; 44.786,13.212 ccw(c45.629,13.212) 45.123,12.538 cw(c45.629,13.212) 44.786,13.212 ; 44.786,13.532 cw(c43.703,13.532) 44.354,12.666 ccw(c43.703,13.532) 44.786,13.532 ; 44.786,13.532 ccw(c45.869,13.532) 45.219,12.666 cw(c45.869,13.532) 44.786,13.532 ; 44.963,92.725 cw(c46.175,91.513) 46.175,93.227 ccw(c46.175,91.513) 44.963,92.725 ; 44.963,92.725 ccw(c43.751,93.937) 45.465,93.937 cw(c43.751,93.937) 44.963,92.725 ; 45.236,92.998 cw(c46.175,92.059) 46.175,93.387 ccw(c46.175,92.059) 45.236,92.998 ; 45.236,92.998 ccw(c44.297,93.937) 45.625,93.937 cw(c44.297,93.937) 45.236,92.998 ; 45.337,43.998 cw(c44.806,43.998) 45.181,43.623 ccw(c44.806,43.998) 45.337,43.998 ; 45.337,43.998 ccw(c45.868,43.998) 45.492,43.623 cw(c45.868,43.998) 45.337,43.998 ; 45.515,80.909 cw(c46.046,80.909) 45.67,81.284 ccw(c46.046,80.909) 45.515,80.909 ; 45.515,80.909 ccw(c44.983,80.909) 45.359,81.284 cw(c44.983,80.909) 45.515,80.909 ; 45.616,72.273 cw(c46.147,72.273) 45.772,72.648 ccw(c46.147,72.273) 45.616,72.273 ; 45.616,72.273 ccw(c45.085,72.273) 45.461,72.648 cw(c45.085,72.273) 45.616,72.273 ; 45.974,19.334 cw(c46.185,19.334) 46.185,19.545 ccw(c46.185,19.334) 45.974,19.334 ; 45.974,19.334 ccw(c45.629,19.334) 45.786,19.641 cw(c45.629,19.334) 45.974,19.334 ; 46.05,16.434 cw(c46.137,16.347) 46.215,16.442 ccw(c46.137,16.347) 46.05,16.434 ; 46.097,10.78 cw(c44.868,9.55) 46.606,9.55 ccw(c44.868,9.55) 46.097,10.78 ; 46.097,10.78 ccw(c47.326,12.009) 47.326,10.27 cw(c47.326,12.009) 46.097,10.78 ; 46.251,41.712 cw(c45.72,41.712) 46.096,41.337 ccw(c45.72,41.712) 46.251,41.712 ; 46.251,41.712 ccw(c46.782,41.712) 46.407,41.337 cw(c46.782,41.712) 46.251,41.712 ; 46.37,10.506 cw(c45.414,9.55) 46.766,9.55 ccw(c45.414,9.55) 46.37,10.506 ; 46.37,10.506 ccw(c47.326,11.462) 47.326,10.11 cw(c47.326,11.462) 46.37,10.506 ; 46.556,83.144 cw(c47.087,83.144) 46.712,83.52 ccw(c47.087,83.144) 46.556,83.144 ; 46.556,83.144 ccw(c46.025,83.144) 46.4,83.52 cw(c46.025,83.144) 46.556,83.144 ; 46.644,10.233 cw(c45.961,9.55) 46.926,9.55 ccw(c45.961,9.55) 46.644,10.233 ; 46.644,10.233 ccw(c47.326,10.916) 47.326,9.95 cw(c47.326,10.916) 46.644,10.233 ; 46.683,77.374 cw(c46.152,77.374) 46.527,76.998 ccw(c46.152,77.374) 46.683,77.374 ; 46.683,77.374 ccw(c47.214,77.374) 46.839,76.998 cw(c47.214,77.374) 46.683,77.374 ; 47.326,13.056 cw(c46.361,13.056) 47.044,12.373 ccw(c46.361,13.056) 47.326,13.056 ; 47.326,13.056 ccw(c48.292,13.056) 47.609,12.373 cw(c48.292,13.056) 47.326,13.056 ; 47.326,13.442 cw(c45.974,13.442) 46.93,12.486 ccw(c45.974,13.442) 47.326,13.442 ; 47.326,13.442 ccw(c48.678,13.442) 47.722,12.486 cw(c48.678,13.442) 47.326,13.442 ; 47.326,13.829 cw(c45.588,13.829) 46.817,12.6 ccw(c45.588,13.829) 47.326,13.829 ; 47.326,13.829 ccw(c49.065,13.829) 47.836,12.6 cw(c49.065,13.829) 47.326,13.829 ; 47.552,73.688 cw(c47.176,73.312) 47.708,73.312 ccw(c47.176,73.312) 47.552,73.688 ; 47.552,73.688 ccw(c47.928,74.063) 47.928,73.532 cw(c47.928,74.063) 47.552,73.688 ; 47.597,84.262 cw(c48.129,84.262) 47.753,84.637 ccw(c48.129,84.262) 47.597,84.262 ; 47.597,84.262 ccw(c47.066,84.262) 47.442,84.637 cw(c47.066,84.262) 47.597,84.262 ; 47.75,75.647 cw(c47.219,75.647) 47.594,75.271 ccw(c47.219,75.647) 47.75,75.647 ; 47.75,75.647 ccw(c48.281,75.647) 47.905,75.271 cw(c48.281,75.647) 47.75,75.647 ; 48.311,13.54 cw(c48.842,13.54) 48.466,13.916 ccw(c48.842,13.54) 48.311,13.54 ; 48.311,13.54 ccw(c47.78,13.54) 48.155,13.916 cw(c47.78,13.54) 48.311,13.54 ; 48.559,16.987 cw(c48.184,17.363) 48.184,16.832 ccw(c48.184,17.363) 48.559,16.987 ; 48.559,16.987 ccw(c48.935,16.612) 48.404,16.612 cw(c48.935,16.612) 48.559,16.987 ; 48.637,10.78 cw(c47.408,9.55) 49.146,9.55 ccw(c47.408,9.55) 48.637,10.78 ; 48.637,10.78 ccw(c49.866,12.009) 49.866,10.27 cw(c49.866,12.009) 48.637,10.78 ; 48.69,81.539 cw(c48.158,81.539) 48.534,81.164 ccw(c48.158,81.539) 48.69,81.539 ; 48.69,81.539 ccw(c49.221,81.539) 48.845,81.164 cw(c49.221,81.539) 48.69,81.539 ; 48.69,85.379 cw(c49.221,85.379) 48.845,85.755 ccw(c49.221,85.379) 48.69,85.379 ; 48.69,85.379 ccw(c48.158,85.379) 48.534,85.755 cw(c48.158,85.379) 48.69,85.379 ; 48.723,18.315 cw(c50.824,18.315) 49.339,19.8 ccw(c50.824,18.315) 48.723,18.315 ; 48.723,18.315 ccw(c46.623,18.315) 48.108,19.8 cw(c46.623,18.315) 48.723,18.315 ; 48.723,18.701 cw(c50.437,18.701) 49.225,19.913 ccw(c50.437,18.701) 48.723,18.701 ; 48.723,18.701 ccw(c47.009,18.701) 48.221,19.913 cw(c47.009,18.701) 48.723,18.701 ; 48.723,19.088 cw(c50.051,19.088) 49.112,20.026 ccw(c50.051,19.088) 48.723,19.088 ; 48.723,19.088 ccw(c47.396,19.088) 48.334,20.026 cw(c47.396,19.088) 48.723,19.088 ; 48.91,10.506 cw(c47.954,9.55) 49.306,9.55 ccw(c47.954,9.55) 48.91,10.506 ; 48.91,10.506 ccw(c49.866,11.462) 49.866,10.11 cw(c49.866,11.462) 48.91,10.506 ; 49.071,55.555 cw(c48.539,55.555) 48.915,55.18 ccw(c48.539,55.555) 49.071,55.555 ; 49.071,55.555 ccw(c49.602,55.555) 49.226,55.18 cw(c49.602,55.555) 49.071,55.555 ; 49.071,77.785 cw(c49.602,77.785) 49.226,78.16 ccw(c49.602,77.785) 49.071,77.785 ; 49.071,77.785 ccw(c48.539,77.785) 48.915,78.16 cw(c48.539,77.785) 49.071,77.785 ; 49.184,10.233 cw(c48.501,9.55) 49.466,9.55 ccw(c48.501,9.55) 49.184,10.233 ; 49.184,10.233 ccw(c49.866,10.916) 49.866,9.95 cw(c49.866,10.916) 49.184,10.233 ; 51.026,78.496 cw(c51.558,78.496) 51.182,78.871 ccw(c51.558,78.496) 51.026,78.496 ; 51.026,78.496 ccw(c50.495,78.496) 50.871,78.871 cw(c50.495,78.496) 51.026,78.496 ; 51.91,86.83 cw(c52.286,87.206) 51.754,87.206 ccw(c52.286,87.206) 51.91,86.83 ; 51.91,86.83 ccw(c51.534,86.455) 51.534,86.986 cw(c51.534,86.455) 51.91,86.83 ; 52.787,37.109 cw(c52.787,36.348) 53.44,36.739 ccw(c52.787,36.348) 52.787,37.109 ; 52.787,37.109 ccw(c52.787,37.871) 53.44,37.479 cw(c52.787,37.871) 52.787,37.109 ; 53.066,39.649 cw(c53.066,39.327) 53.373,39.427 ccw(c53.066,39.327) 53.066,39.649 ; 53.066,39.649 ccw(c53.066,39.972) 53.373,39.872 cw(c53.066,39.972) 53.066,39.649 ; 53.069,37.109 cw(c53.069,36.517) 53.577,36.822 ccw(c53.069,36.517) 53.069,37.109 ; 53.069,37.109 ccw(c53.069,37.702) 53.577,37.397 cw(c53.069,37.702) 53.069,37.109 ; 53.846,87.919 cw(c54.377,87.919) 54.001,88.295 ccw(c54.377,87.919) 53.846,87.919 ; 53.846,87.919 ccw(c53.315,87.919) 53.69,88.295 cw(c53.315,87.919) 53.846,87.919 ; 55.023,72.669 cw(c55.023,73.635) 54.34,72.952 ccw(c55.023,73.635) 55.023,72.669 ; 55.023,72.669 ccw(c55.023,71.704) 54.34,72.387 cw(c55.023,71.704) 55.023,72.669 ; 55.023,75.209 cw(c55.023,76.175) 54.34,75.492 ccw(c55.023,76.175) 55.023,75.209 ; 55.023,75.209 ccw(c55.023,74.244) 54.34,74.927 cw(c55.023,74.244) 55.023,75.209 ; 55.023,77.749 cw(c55.023,78.715) 54.34,78.032 ccw(c55.023,78.715) 55.023,77.749 ; 55.023,77.749 ccw(c55.023,76.784) 54.34,77.467 cw(c55.023,76.784) 55.023,77.749 ; 55.023,80.289 cw(c55.023,81.255) 54.34,80.572 ccw(c55.023,81.255) 55.023,80.289 ; 55.023,80.289 ccw(c55.023,79.324) 54.34,80.007 cw(c55.023,79.324) 55.023,80.289 ; 55.409,72.669 cw(c55.409,74.021) 54.453,73.065 ccw(c55.409,74.021) 55.409,72.669 ; 55.409,72.669 ccw(c55.409,71.317) 54.453,72.273 cw(c55.409,71.317) 55.409,72.669 ; 55.409,75.209 cw(c55.409,76.561) 54.453,75.605 ccw(c55.409,76.561) 55.409,75.209 ; 55.409,75.209 ccw(c55.409,73.857) 54.453,74.813 cw(c55.409,73.857) 55.409,75.209 ; 55.409,77.749 cw(c55.409,79.101) 54.453,78.145 ccw(c55.409,79.101) 55.409,77.749 ; 55.409,77.749 ccw(c55.409,76.397) 54.453,77.353 cw(c55.409,76.397) 55.409,77.749 ; 55.409,80.289 cw(c55.409,81.641) 54.453,80.685 ccw(c55.409,81.641) 55.409,80.289 ; 55.409,80.289 ccw(c55.409,78.937) 54.453,79.893 cw(c55.409,78.937) 55.409,80.289 ; 55.796,72.669 cw(c55.796,74.408) 54.567,73.179 ccw(c55.796,74.408) 55.796,72.669 ; 55.796,72.669 ccw(c55.796,70.931) 54.567,72.16 cw(c55.796,70.931) 55.796,72.669 ; 55.796,75.209 cw(c55.796,76.948) 54.567,75.719 ccw(c55.796,76.948) 55.796,75.209 ; 55.796,75.209 ccw(c55.796,73.471) 54.567,74.7 cw(c55.796,73.471) 55.796,75.209 ; 55.796,77.749 cw(c55.796,79.488) 54.567,78.259 ccw(c55.796,79.488) 55.796,77.749 ; 55.796,77.749 ccw(c55.796,76.011) 54.567,77.24 cw(c55.796,76.011) 55.796,77.749 ; 55.796,80.289 cw(c55.796,82.028) 54.567,80.799 ccw(c55.796,82.028) 55.796,80.289 ; 55.796,80.289 ccw(c55.796,78.551) 54.567,79.78 cw(c55.796,78.551) 55.796,80.289 ; 59.411,82.755 cw(c59.942,82.755) 59.566,83.131 ccw(c59.942,82.755) 59.411,82.755 ; 59.411,82.755 ccw(c58.879,82.755) 59.255,83.131 cw(c58.879,82.755) 59.411,82.755 ; 60.3,67.335 cw(c60.3,65.572) 61.609,66.753 ccw(c60.3,65.572) 60.3,67.335 ; 60.3,67.335 ccw(c60.3,69.099) 61.609,67.918 cw(c60.3,69.099) 60.3,67.335 ; 60.401,69.875 cw(c60.401,68.335) 61.586,69.319 ccw(c60.401,68.335) 60.401,69.875 ; 60.401,69.875 ccw(c60.401,71.416) 61.586,70.431 cw(c60.401,71.416) 60.401,69.875 ; 60.427,72.415 cw(c60.427,70.928) 61.58,71.867 ccw(c60.427,70.928) 60.427,72.415 ; 60.427,72.415 ccw(c60.427,73.902) 61.58,72.964 cw(c60.427,73.902) 60.427,72.415 ; 60.655,80.035 cw(c60.655,78.999) 61.525,79.562 ccw(c60.655,78.999) 60.655,80.035 ; 60.655,80.035 ccw(c60.655,81.072) 61.525,80.508 cw(c60.655,81.072) 60.655,80.035 ; 60.659,67.335 cw(c60.659,65.897) 61.728,66.86 ccw(c60.659,65.897) 60.659,67.335 ; 60.659,67.335 ccw(c60.659,68.774) 61.728,67.811 cw(c60.659,68.774) 60.659,67.335 ; 60.742,69.875 cw(c60.742,68.618) 61.709,69.422 ccw(c60.742,68.618) 60.742,69.875 ; 60.742,69.875 ccw(c60.742,71.133) 61.709,70.329 cw(c60.742,71.133) 60.742,69.875 ; 60.763,72.415 cw(c60.763,71.202) 61.705,71.967 ccw(c60.763,71.202) 60.763,72.415 ; 60.763,72.415 ccw(c60.763,73.629) 61.705,72.863 cw(c60.763,73.629) 60.763,72.415 ; 60.95,80.035 cw(c60.95,79.19) 61.66,79.649 ccw(c60.95,79.19) 60.95,80.035 ; 60.95,80.035 ccw(c60.95,80.881) 61.66,80.421 cw(c60.95,80.881) 60.95,80.035 ; 61.019,67.335 cw(c61.019,66.221) 61.847,66.967 ccw(c61.019,66.221) 61.019,67.335 ; 61.019,67.335 ccw(c61.019,68.45) 61.847,67.704 cw(c61.019,68.45) 61.019,67.335 ; 61.083,69.875 cw(c61.083,68.901) 61.832,69.524 ccw(c61.083,68.901) 61.083,69.875 ; 61.083,69.875 ccw(c61.083,70.849) 61.832,70.227 cw(c61.083,70.849) 61.083,69.875 ; 61.099,72.415 cw(c61.099,71.475) 61.829,72.068 ccw(c61.099,71.475) 61.099,72.415 ; 61.099,72.415 ccw(c61.099,73.355) 61.829,72.762 cw(c61.099,73.355) 61.099,72.415 ; 61.244,80.035 cw(c61.244,79.38) 61.794,79.736 ccw(c61.244,79.38) 61.244,80.035 ; 61.244,80.035 ccw(c61.244,80.691) 61.794,80.334 cw(c61.244,80.691) 61.244,80.035 ; 70.822,77.266 cw(c70.221,77.868) 70.108,77.025 ccw(c70.221,77.868) 70.822,77.266 ; 70.822,77.266 ccw(c71.424,76.665) 70.581,76.552 cw(c71.424,76.665) 70.822,77.266 ; 70.822,80.773 cw(c71.424,81.374) 70.581,81.487 ccw(c71.424,81.374) 70.822,80.773 ; 70.822,80.773 ccw(c70.221,80.171) 70.108,81.014 cw(c70.221,80.171) 70.822,80.773 ; 70.974,83.16 cw(c71.913,84.099) 70.585,84.099 ccw(c71.913,84.099) 70.974,83.16 ; 70.974,83.16 ccw(c70.035,82.222) 70.035,83.549 cw(c70.035,82.222) 70.974,83.16 ; 71.051,77.495 cw(c70.275,78.271) 70.129,77.183 ccw(c70.275,78.271) 71.051,77.495 ; 71.051,77.495 ccw(c71.827,76.719) 70.739,76.573 cw(c71.827,76.719) 71.051,77.495 ; 71.051,80.544 cw(c71.827,81.32) 70.739,81.465 ccw(c71.827,81.32) 71.051,80.544 ; 71.051,80.544 ccw(c70.275,79.767) 70.129,80.856 cw(c70.275,79.767) 71.051,80.544 ; 71.247,82.887 cw(c72.459,84.099) 70.745,84.099 ccw(c72.459,84.099) 71.247,82.887 ; 71.247,82.887 ccw(c70.035,81.675) 70.035,83.389 cw(c70.035,81.675) 71.247,82.887 ; 71.28,77.724 cw(c70.329,78.675) 70.151,77.342 ccw(c70.329,78.675) 71.28,77.724 ; 71.28,77.724 ccw(c72.231,76.773) 70.898,76.595 cw(c72.231,76.773) 71.28,77.724 ; 71.28,80.315 cw(c72.231,81.266) 70.898,81.444 ccw(c72.231,81.266) 71.28,80.315 ; 71.28,80.315 ccw(c70.329,79.364) 70.151,80.697 cw(c70.329,79.364) 71.28,80.315 ; 71.521,82.614 cw(c73.006,84.099) 70.905,84.099 ccw(c73.006,84.099) 71.521,82.614 ; 71.521,82.614 ccw(c70.035,81.129) 70.035,83.229 cw(c70.035,81.129) 71.521,82.614 ; 72.575,70.187 cw(c71.248,70.187) 72.186,69.248 ccw(c71.248,70.187) 72.575,70.187 ; 72.575,70.187 ccw(c73.903,70.187) 72.964,69.248 cw(c73.903,70.187) 72.575,70.187 ; 72.575,70.573 cw(c70.861,70.573) 72.073,69.361 ccw(c70.861,70.573) 72.575,70.573 ; 72.575,70.573 ccw(c74.289,70.573) 73.077,69.361 cw(c74.289,70.573) 72.575,70.573 ; 72.575,70.96 cw(c70.475,70.96) 71.96,69.475 ccw(c70.475,70.96) 72.575,70.96 ; 72.575,70.96 ccw(c74.676,70.96) 73.191,69.475 cw(c74.676,70.96) 72.575,70.96 ; 73.861,75.209 cw(c73.861,74.667) 74.245,75.05 ccw(c73.861,74.667) 73.861,75.209 ; 73.861,75.209 ccw(c73.861,75.752) 74.245,75.368 cw(c73.861,75.752) 73.861,75.209 ; 88.493,69.537 cw(c88.287,69.744) 88.149,69.486 ccw(c88.287,69.744) 88.493,69.537 ; 88.493,69.537 ccw(c88.7,69.331) 88.442,69.193 cw(c88.7,69.331) 88.493,69.537 ; 88.646,69.69 cw(c88.393,69.943) 88.225,69.627 ccw(c88.393,69.943) 88.646,69.69 ; 88.646,69.69 ccw(c88.899,69.437) 88.583,69.269 cw(c88.899,69.437) 88.646,69.69 ; 88.646,83.972 cw(c88.646,82.505) 89.719,83.506 ; 88.646,83.972 ccw(c88.646,85.066) 89.598,84.528 ; 88.646,83.972 cw(c88.646,82.505) 89.719,83.506 ; 88.646,83.972 ccw(c88.646,85.066) 89.598,84.528 ; 88.646,83.972 cw(c88.646,82.505) 89.719,83.506 ; 88.646,83.972 ccw(c88.646,85.066) 89.598,84.528 ; 88.646,83.972 cw(c88.646,82.505) 89.719,83.506 ; 88.646,83.972 ccw(c88.646,85.066) 89.598,84.528